# Altium PCB PCB1.PcbDoc
Units mm, origin at the board's own origin, x right, y up, seen from the top; angles counter-clockwise.
Board outline 196.75 x 32.25 mm, 2 copper layers (Top Layer, Bottom Layer); 33 components, 77 nets, 283 pads, 68 vias.
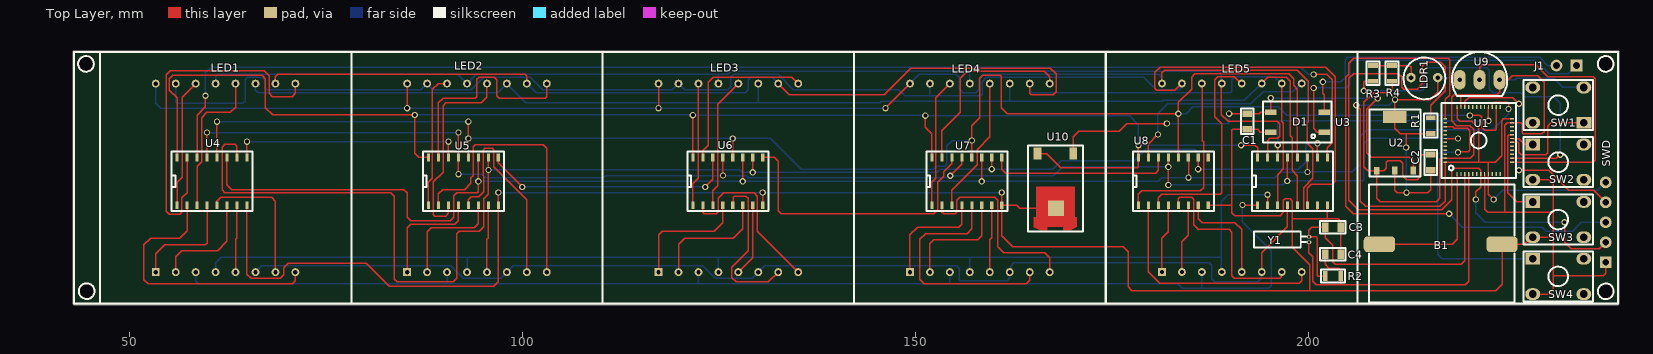
[diagram p0: Top Layer view]
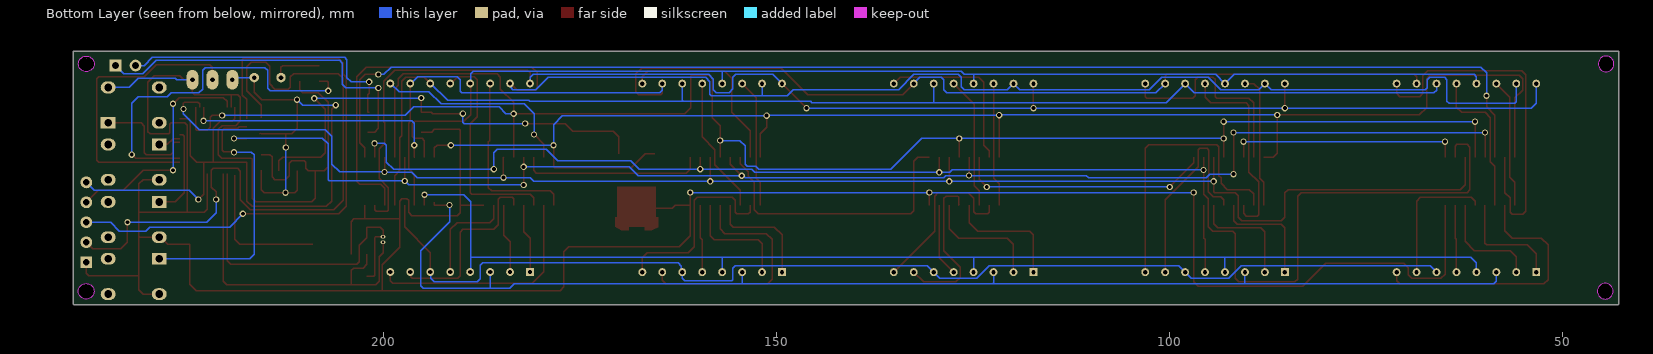
[diagram p1: Bottom Layer view, seen from below]

## Layer stack, top to bottom
Top Solder: solder mask 0.0102, Solder Resist, Dk 3.5
Top Layer: signal copper 0.0356
Dielectric 1: dielectric 0.32, FR-4, Dk 4.8
Bottom Layer: signal copper 0.0356
Bottom Solder: solder mask 0.0102, Solder Resist, Dk 3.5

## Board outline
42.925,62.019 cw(c42.925,62.146) 42.798,62.146 42.798,94.146 cw(c42.925,94.146) 42.925,94.273 239.425,94.273 cw(c239.425,94.146) 239.552,94.146 239.552,62.146 cw(c239.425,62.146) 239.425,62.019
cut-out: 44.425,91.65 cw(c44.425,92.65) 43.425,92.65 cw(c44.425,92.65) 44.425,93.65 cw(c44.425,92.65) 45.425,92.65 cw(c44.425,92.65)
cut-out: 44.525,62.725 cw(c44.525,63.725) 43.525,63.725 cw(c44.525,63.725) 44.525,64.725 cw(c44.525,63.725) 45.525,63.725 cw(c44.525,63.725)
cut-out: 236.9,63.7 ccw(c237.9,63.7) 237.9,62.7 ccw(c237.9,63.7) 238.9,63.7 ccw(c237.9,63.7) 237.9,64.7 ccw(c237.9,63.7)
cut-out: 236.875,92.65 ccw(c237.875,92.65) 237.875,91.65 ccw(c237.875,92.65) 238.875,92.65 ccw(c237.875,92.65) 237.875,93.65 ccw(c237.875,92.65)
cut-out: 238.45,93.326 238.453,93.323
cut-out: 237.875,93.3

## Design rules (kind name [scope] priority, off if disabled: settings)
Clearance [All] p1: gap=0.2 ignorepadtopadclearanceinfootprint=FALSE
PolygonConnect [All] p1: connectstyle=Relief reliefconductorwidth=0.254 reliefentries=4 polygonreliefangle="90 Angle" airgapwidth=0.254
RoutingVias [All] p1: holewidth=0.5 width=0.8 viastyle="Through Hole" minholewidth=0.5 minwidth=0.8 maxholewidth=0.5 maxwidth=0.8
SolderMaskExpansion [All] p1: expansion=0.102
Width [All] p1: maxlimit=0.18 minlimit=0.18 preferedwidth=0.18
30 further rules are at their usual default settings.

## Components (designator, comment, footprint, x,y, rotation, side; value= is the part's Value field where it differs from the comment)
B1 "cr1202" CR1220 216.882,69.699 r270 top
C1 "102pF" C0805 192.244,85.32 r90 top
C2 "102pF" C0805 215.612,80.113 r270 top
C3 "102pF" C0805 203.166,71.846 r180 top
C4 "102pF" C0805 203.166,68.429 r180 top
D1 "MB2S" TO-269AA 198.645,85.247 r180 top
J1 "Power" "Header 2x1 TH Pitch 2.54mm" 232.884,92.446 r180 top
LDR1 "LDR" LDR_CELL_THRU_HOLE 214.801,90.908 r0 top
LED1 "1088AS/BS" LED_MATRIX_1088AS/BS 62.196,78.146 r0 top
LED2 "1088AS/BS" LED_MATRIX_1088AS/BS 94.2,78.146 r0 top
LED3 "1088AS/BS" LED_MATRIX_1088AS/BS 126.204,78.146 r0 top
LED4 "1088AS/BS" LED_MATRIX_1088AS/BS 158.208,78.146 r0 top
LED5 "1088AS/BS" LED_MATRIX_1088AS/BS 190.288,78.157 r0 top
R1 "10k" R0805 217.136,84.746 r270 top
R2 "1M" R0805 203.116,64.122 r180 top
R3 "10k" R0805 209.77,91.396 r270 top
R4 "10k" R0805 212.214,91.396 r270 top
SW1 "Button1" BUTTON_HOLE_5.0mm 231.843,87.406 r270 top
SW2 "Button1" BUTTON_HOLE_5.0mm 231.843,80.149 r90 top
SW3 "Button1" BUTTON_HOLE_5.0mm 231.843,72.838 r90 top
SW4 "Button1" BUTTON_HOLE_5.0mm 231.843,65.599 r90 top
SWD "SWD" "Header 5x1 TH Pitch 2.54mm" 237.875,72.493 r90 top (schematic designator J2)
U1 "STM32F100C8T6" LQFP048_FPT-48P-M05 221.708,82.907 r90 top
U2 "AMS1117" SOT223-3 211.04,82.526 r0 top
U3 "74HC595D" SO16 197.705,77.8 r90 top
U4 "74HC595D" SO16 60.164,77.8 r90 top
U5 "74HC595D" SO16 92.168,77.8 r90 top
U6 "74HC595D" SO16 125.823,77.8 r90 top
U7 "74HC595D" SO16 156.252,77.8 r90 top
U8 "74HC595D" SO16 182.544,77.8 r90 top
U9 "LM35" TO92A 221.828,90.646 r0 top
U10 "LM7805" TO252-3 167.811,76.68 r180 top
Y1 "32.768KHz" DT-26 200.113,70.303 r0 top

## Footprints (in the part's own frame and the unit in brackets; to place one, negate y for a bottom-side part, rotate by r counter-clockwise, add the part's x,y. Pads: shape width x height; smd on the part's side, far side on the other; paste and mask are expansions set on the pad)
BUTTON_HOLE_5.0mm [mm]
  rect 1.5x1.9 hole 1: 1(2.25,3.25)
  oval 1.5x1.9 hole 1: 2(2.25,-3.25) 3(-2.25,3.25) 4(-2.25,-3.25)
  silkscreen extent -3.18,-4.4 3.17,4.42, body extent -3,-3.86 3,3.86, height 5
C0805 [mm]
  rect 0.8x1.2 smd: 1(-1,0) 2(1,0)
  silkscreen extent -1.6,-0.81 1.63,0.81, body extent -1,-0.62 1,0.63, height 0.58
CR1220 [mm]
  rrect50% 2x4 smd: 1(0,-7.8) 2(0,7.8)
  silkscreen extent -7.62,-9.15 7.4,9.37, body extent -7.62,-9.1 7.37,9.4, height 4.04
DT-26 [mm]
  oval 0.6x0.5 hole 0.3: 1(0,0.35) 2(0,-0.35)
  silkscreen extent -7,-1 -0.35,1, body extent -7,-1 0.14,1, height 2
"Header 2x1 TH Pitch 2.54mm" [mm]
  rect 1.5x1.5 hole 0.85: 1(-1.27,0)
  round 1.5 hole 0.85: 2(1.27,0)
  body extent -2.54,-1.27 2.54,1.27, height 8.89
"Header 5x1 TH Pitch 2.54mm" [mm]
  rect 1.5x1.5 hole 0.85: 1(-5.08,0)
  round 1.5 hole 0.85: 2(-2.54,0) 3(0,0) 4(2.54,0) 5(5.08,0)
  body extent -6.35,-1.27 6.35,1.27, height 8.89
LDR_CELL_THRU_HOLE [mm]
  round 1.2 hole 0.6: 1(-1.7,0) 2(1.7,0)
  silkscreen extent -2.65,-2.76 2.66,2.56, body extent -2.55,-2.15 2.55,2.15, height 2.02
LED_MATRIX_1088AS/BS [mm]
  rect 1x1 hole 0.55: 1(-8.89,-12)
  round 1 hole 0.55: 2(-6.35,-12) 3(-3.81,-12) 4(-1.27,-12) 5(1.27,-12) 6(3.81,-12) 7(6.35,-12) 8(8.89,-12) 9(8.89,12) 10(6.35,12) 11(3.81,12) 12(1.27,12) 13(-1.27,12) 14(-3.81,12) 15(-6.35,12) 16(-8.89,12)
  silkscreen extent -16,-16 16,16, body extent -16,-16 16,16, height 8
LQFP048_FPT-48P-M05 [mm]
  rect 0.5x0.18 smd: 1(-4.25,2.75) 2(-4.25,2.25) 3(-4.25,1.75) 4(-4.25,1.25) 5(-4.25,0.75) 6(-4.25,0.25) 7(-4.25,-0.25) 8(-4.25,-0.75) 9(-4.25,-1.25) 10(-4.25,-1.75) 11(-4.25,-2.25) 12(-4.25,-2.75) 25(4.25,-2.75) 26(4.25,-2.25) 27(4.25,-1.75) 28(4.25,-1.25) 29(4.25,-0.75) 30(4.25,-0.25) 31(4.25,0.25) 32(4.25,0.75) 33(4.25,1.25) 34(4.25,1.75) 35(4.25,2.25) 36(4.25,2.75)
  rect 0.18x0.5 smd: 13(-2.75,-4.25) 14(-2.25,-4.25) 15(-1.75,-4.25) 16(-1.25,-4.25) 17(-0.75,-4.25) 18(-0.25,-4.25) 19(0.25,-4.25) 20(0.75,-4.25) 21(1.25,-4.25) 22(1.75,-4.25) 23(2.25,-4.25) 24(2.75,-4.25) 37(2.75,4.25) 38(2.25,4.25) 39(1.75,4.25) 40(1.25,4.25) 41(0.75,4.25) 42(0.25,4.25) 43(-0.25,4.25) 44(-0.75,4.25) 45(-1.25,4.25) 46(-1.75,4.25) 47(-2.25,4.25) 48(-2.75,4.25)
  silkscreen extent -4.75,-4.75 4.75,4.75, body extent -4.5,-4.5 4.5,4.5, height 1.5
R0805 [mm]
  rect 0.6x1.24 smd: 1(-1.05,-1.524) 2(0.95,-1.524)
  silkscreen extent -1.57,-2.36 1.45,-0.69, body extent -1.05,-2.15 0.95,-0.9, height 0.45
SO16 [mm]
  rect 1x0.4 smd: 1(-3.137,4.14) 2(-3.137,2.87) 3(-3.137,1.6) 4(-3.137,0.33) 5(-3.137,-0.94) 6(-3.137,-2.21) 7(-3.137,-3.48) 8(-3.137,-4.75) 9(2.948,-4.748) 10(2.948,-3.478) 11(2.948,-2.208) 12(2.948,-0.938) 13(2.948,0.332) 14(2.948,1.602) 15(2.948,2.872) 16(2.948,4.142)
  silkscreen extent -3.86,-5.46 3.68,4.85, body extent -3.17,-5.29 2.97,4.68, height 1.75
SOT223-3 [mm]
  rect 0.7x1 smd: 1(-2.3,-3.475) 2(0,-3.45) 3(2.325,-3.45)
  rect 3x1.5 smd: 2(0,3.375)
  silkscreen extent -3.25,-4.2 3.25,4.35, body extent -3.25,-3.5 3.25,3.5, height 1.7
TO92A [mm]
  oval 1.5x2.5 hole 0.6: 1(-2.54,0) 2(0,0) 3(2.54,0)
  silkscreen extent -3.51,-2.05 3.51,3.52, body extent -2.74,-1.38 2.78,2.3, height 9.79
TO252-3 [mm]
  rect 1x1.5 smd: 1(-2.284,-4.568) 3(2.262,-4.568)
  rect 2x2 smd: 2(-0.1,2.4)
  Top Layer region: -1.954,5.186 -2.767,4.779 -2.767,3.535 -2.513,3.535 -2.513,-0.351 2.44,-0.351 2.44,3.535 2.745,3.535 2.745,4.814 1.932,5.186 0.992,5.186 0.992,4.779 -0.989,4.779 -0.989,5.186
  silkscreen extent -3.53,-5.56 3.48,5.33, body extent -3.39,-4.93 3.34,5.17, height 2.37
TO-269AA [mm]
  rect 1.5x0.7 smd: 1(-3.4,1.275) 2(-3.4,-1.275) 3(3.4,-1.25) 4(3.4,1.275)
  silkscreen extent -4.34,-2.62 4.37,2.62, body extent -3.52,-2.47 3.52,2.47, height 2.7

## Part data
B1: library part Batery
C1 C2 C3 C4: library part Capacitors(SMD)
D1: library part "Diode MB2S"
J1: library part "Header 2x1 TH Pitch 2.54mm"
LED1 LED2 LED3 LED4 LED5: library part LED_MATRIX_1088AS/BS
R1 R2 R3 R4: library part "Resistor SMD"
SWD: library part "Header 5x1 TH Pitch 2.54mm"
U2: library part AMS1117(SOT-223)
Y1: library part "Crystal 32.768KHz"

## Via types
v1: diameter 0.8, hole 0.5, Top Layer to Bottom Layer, 68 vias

## Nets (pads, with @x,y where several pads share a name; then routed paths per layer and width w, separated by ;. In a path a pad name is that pad's centre, name@x,y a point inside that pad or via, vN(x,y) a via of type N, cw(c..) or ccw(c..) an arc to the next point about the centre after c; other vN are vias at no path point)
3.3V: C2.2 LDR1.2 R1.2 SWD.5 U1.9 U1.24 U1.36 U1.48 U2.2 U9.1 | length 113.2
  Top Layer w0.18: v1(206.127,87.407) 206.65,86.884 206.65,75.185 207.33,74.505 216.778,74.505 217.458,75.185 U1.48 221.745,80.157 ; U2.2@211.04,79.076 211.04,76.591 211.375,76.256 v1(212.53,76.256) 215.206,76.256 215.612,76.662 C2.2 ; v1(212.475,82.025) 212.461,82.039 212.461,83.747 ; R1.2 215.612,83.747 212.461,83.747 ; R1.2@215.723,83.747 R1.2@215.772,83.796 ; LDR1.2 216.501,89.071 215.53,88.1 v1(211.05,88.1) 211.04,88.09 211.04,85.901 211.04,84.458 211.751,83.747 212.461,83.747 ; U1.36 218.958,85.675 219.288,85.345 220.805,85.345 221.708,84.442 221.708,80.194 221.745,80.157 ; v1(223.618,75.4) 222.958,76.06 U1.9 222.958,80.157 ; U1.24 224.87,85.657 224.631,85.418 224.631,80.963 223.825,80.157 222.958,80.157 ; 221.745,80.157 222.958,80.157
  Bottom Layer w0.18: v1(206.127,87.407) 210.357,87.407 v1(211.05,88.1) ; v1(212.475,82.025) 212.503,81.997 212.503,76.284 v1(212.53,76.256) ; LDR1.2 219.026,90.908 U9.1 ; v1(223.618,75.4) 224.768,76.55 236.852,76.55 SWD.5
GND: B1.2 C1.1 C2.1 C3.1 C4.1 D1.4 R4.2 SW1.3 SW2.3 SW3.3 SW4.3 SWD.1 U1.8 U1.23 U1.35 U1.47 U2.1 U3.8 U4.8 U5.8 U6.8 U7.8 U8.8 U9.3 U10.2 | length 418.8
  Top Layer w0.18: U4.8 64.914,65.889 65.447,65.356 69.156,65.356 69.629,65.829 69.629,66.729 70.175,67.275 80.101,67.275 83.011,64.365 96.357,64.365 96.918,64.926 U5.8 v1(96.918,76.278) ; U6.8 v1(130.573,76.278) ; v1(161.002,76.278) U7.8 ; U10.2@167.527,74.663 U10.2 163.277,74.28 162.893,74.663 U7.8 ; U8.8 190.241,74.663 190.252,74.652 190.288,74.688 ; D1.4 193.913,83.972 193.565,84.32 C1.1 190.415,84.32 190.288,84.193 190.288,74.688 ; U3.8 202.455,72.932 ; C4.1 C3.1 204.166,72.584 203.818,72.932 202.455,72.932 ; R4.2 210.69,89.365 210.325,89 208.34,89 207.082,87.742 207.082,79.576 207.607,79.051 U2.1 ; C2.1 214.534,81.113 214.24,80.819 214.24,78.277 213.862,77.899 212.54,77.899 212.047,78.392 212.047,80.021 211.751,80.316 210.127,80.316 209.96,80.149 209.96,79.385 209.626,79.051 U2.1 ; U1.35 219.458,88.726 ; U1.8 222.458,74.162 222.845,73.775 225.036,73.775 ; SW4.3 230.624,63.349 231.175,63.9 231.175,65.677 ; SW2.3 230.651,77.899 231.175,77.375 231.175,73.775 ; SWD.1 237.9,67.388 237.9,66.025 237.552,65.677 236.139,65.677 231.175,65.677 ; U7.8 161.002,70.774 162.42,69.356 176.44,69.356 177.075,68.721 177.075,64.263 177.53,63.808 200.217,63.808 ; 190.288,74.688 190.288,73.702 190.665,73.325 196.425,73.325 196.867,73.767 196.867,75.265 197.066,75.465 197.73,75.465 198.01,75.185 198.01,72.932 ; 198.01,72.932 202.455,72.932 ; 198.01,72.932 198.01,69.293 200.217,67.086 200.217,63.808 ; 200.217,63.808 223.883,63.808 224.682,64.607 B1.2 227.504,69.699 228.393,70.588 SW3.3 231.101,70.588 231.15,70.637 231.175,70.637 ; U2.1 208.74,75.526 209.168,75.098 216.334,75.098 216.775,75.539 216.775,80.567 216.865,80.657 U1.47 220.652,80.657 221.078,81.083 221.078,84.322 220.588,84.812 218.875,84.812 218.279,85.408 218.279,88.419 218.586,88.726 219.458,88.726 ; 219.458,88.726 224.06,88.726 224.368,89.034 U9.3 225.458,90.646 225.958,91.146 229.203,91.146 230.057,90.292 230.057,84.032 229.772,83.747 227.414,83.747 227.241,83.92 227.241,84.954 227.038,85.157 U1.23 225.355,85.157 225.036,84.838 225.036,73.775 ; 225.036,73.775 231.175,73.775 ; 231.175,65.677 231.175,70.637 ; 231.175,70.637 231.175,73.775
  Bottom Layer w0.18: v1(96.918,76.278) v1(130.573,76.278) v1(161.002,76.278) ; U9.3 226.382,90.646 226.542,90.806 231.258,90.806 232.409,89.656 SW1.3
NetB1_1: B1.1 U1.1 | length 18.3
  Top Layer w0.18: B1.1 218.349,69.699 218.958,70.308 U1.1@218.958,78.487
NetC1_2: C1.2 D1.3 U2.3 U10.1 | length 59.7
  Top Layer w0.18: U10.1 170.095,83.395 170.8,84.1 175.929,84.1 176.884,85.055 v1(182.013,85.055) ; v1(189.954,86.32) C1.2 192.253,86.311 193.763,86.311 193.949,86.497 D1.3 v1(195.245,88.3) ; v1(208.866,88.266) 207.462,86.862 207.462,81.351 208.029,80.784 212.893,80.784 213.365,80.311 U2.3
  Bottom Layer w0.18: v1(182.013,85.055) 189.752,85.055 189.954,85.257 v1(189.954,86.32) ; v1(195.245,88.3) 195.278,88.3 195.295,88.283 208.849,88.283 v1(208.866,88.266)
NetC3_2: C3.2 R2.2 U1.3 Y1.1 | length 43
  Top Layer w0.18: R2.2 201.29,65.646 201.185,65.751 201.185,70.537 201.069,70.653 Y1.1 200.113,71.5 200.458,71.846 C3.2 202.166,70.537 203.147,69.556 203.147,67.469 203.474,67.143 219.509,67.143 219.958,67.592 U1.3
NetC4_2: C4.2 R2.1 U1.4 Y1.2 | length 44.4
  Top Layer w0.18: Y1.2 200.113,68.591 200.601,68.103 200.601,65.014 201.046,64.569 204.166,64.569 ; C4.2 202.166,67.143 202.652,66.657 203.866,66.657 204.166,66.357 R2.1 204.166,64.569 ; U1.4 220.458,65.004 220.023,64.569 204.166,64.569
NetD1_1: D1.1 J1.1 | length 44.3
  Top Layer w0.18: v1(200.702,89.587) 200.702,84.455 201.185,83.972 D1.1
  Bottom Layer w0.18: v1(200.702,89.587) 204.841,89.587 205.3,90.047 205.3,92.75 205.645,93.095 228.98,93.095 230.684,91.391 233.099,91.391 J1.1
NetD1_2: D1.2 J1.2 | length 36.9
  Top Layer w0.18: D1.2@201.871,86.522 D1.2 202.045,88.726 201.871,88.9 v1(201.871,90.375)
  Bottom Layer w0.18: v1(201.871,90.375) 204.175,90.375 204.704,90.904 204.704,93.208 204.971,93.475 229.467,93.475 230.496,92.446 J1.2
NetLDR1_1: LDR1.1 R3.1 R4.1 | length 6.3
  Top Layer w0.18: R3.1 R4.1 212.894,92.446 213.101,92.239 LDR1.1
NetLED1_1: LED1.1 U4.4 | length 14.3
  Top Layer w0.18: LED1.1 53.306,68.481 54.44,69.615 59.634,69.615 59.834,69.815 U4.4
NetLED1_2: LED1.2 U4.6 | length 13.9
  Top Layer w0.18: LED1.2 55.846,68.113 56.608,68.875 61.175,68.875 62.374,70.074 U4.6
NetLED1_3: LED1.3 LED2.3 LED3.3 LED4.3 LED5.3 U3.1 | length 159.3
  Top Layer w0.18: v1(191.644,74.688) 193.539,74.688 U3.1 U3.1@193.565,75.033
  Bottom Layer w0.18: LED1.3 58.386,65.014 58.75,64.65 90.376,64.65 ; LED2.3 90.39,64.664 90.376,64.65 ; LED3.3 122.394,64.806 122.55,64.65 ; LED4.3 154.398,64.65 ; LED5.3 186.478,64.085 186.468,64.075 ; v1(191.644,74.688) 191.644,72.531 195.295,68.88 195.295,64.395 194.975,64.075 186.468,64.075 ; 90.376,64.65 122.55,64.65 ; 122.55,64.65 154.398,64.65 ; 154.398,64.65 183.382,64.65 183.957,64.075 186.468,64.075
NetLED1_4: LED1.4 LED2.4 LED3.4 LED4.4 LED5.4 U3.2 | length 151.9
  Top Layer w0.18: U3.2 v1(194.835,75.998)
  Bottom Layer w0.18: LED1.4 60.926,67.316 61.666,68.056 93.005,68.056 ; LED2.4 92.93,67.981 93.005,68.056 ; LED3.4 124.934,67.995 124.995,68.056 ; LED4.4 156.938,68.025 156.969,68.056 ; LED5.4@188.942,66.146 188.942,68.056 ; v1(194.835,75.998) 189.806,75.998 188.942,75.135 188.942,68.056 ; 93.005,68.056 124.995,68.056 ; 124.995,68.056 156.969,68.056 ; 156.969,68.056 188.942,68.056
NetLED1_5: LED1.5 U4.7 | length 8.6
  Top Layer w0.18: LED1.5 63.466,70.309 63.644,70.486 U4.7
NetLED1_6: LED1.6 LED2.6 LED3.6 LED4.6 LED5.6 U3.4 | length 147.4
  Top Layer w0.18: LED5.6@194.022,66.146 LED5.6@194.098,66.222 ; LED5.6 LED5.6@194.098,66.222 ; U3.4 197.375,71.896 194.098,68.619 LED5.6@194.098,66.222
  Bottom Layer w0.18: LED1.6 66.796,66.936 90.893,66.936 92.473,65.356 97.22,65.356 LED2.6 98.8,66.936 122.922,66.936 124.502,65.356 129.224,65.356 LED3.6 130.804,66.936 155.278,66.936 155.568,66.646 155.568,65.156 155.694,65.03 161.692,65.03 162.018,65.356 LED4.6 162.118,66.246 162.118,66.916 162.518,67.316 187.434,67.316 187.75,67 187.75,65.275 188.101,64.924 193.598,64.924 194.022,65.348 LED5.6@194.022,66.146
NetLED1_7: LED1.7 U4.5 | length 17.4
  Top Layer w0.18: U4.5 61.104,75.174 61.58,75.65 68.059,75.65 68.546,75.163 LED1.7
NetLED1_8: LED1.8 U4.2 | length 34.7
  Top Layer w0.18: U4.2 57.294,71.434 56.346,70.486 52.671,70.486 51.8,69.615 51.8,65.17 52.326,64.644 70.669,64.644 71.086,65.061 LED1.8
NetLED1_9: LED1.9 U4.15 | length 47.6
  Top Layer w0.18: U4.15 57.292,76.275 56.608,75.592 56.608,73.755 56.346,73.493 55.033,73.493 54.652,73.874 54.652,91.287 55.133,91.768 67.127,91.768 67.733,91.162 67.733,88.925 68.163,88.495 70.656,88.495 71.086,88.925 LED1.9
NetLED1_10: LED1.10 LED2.10 LED3.10 LED4.10 LED5.10 U3.3 | length 164.1
  Top Layer w0.18: LED1.10 68.546,91.009 68.853,91.316 100.334,91.316 100.55,91.1 LED2.10 ; LED3.10 133.951,88.749 146.067,88.749 149.419,92.101 167.199,92.101 167.911,91.389 167.911,89.079 167.581,88.749 164.736,88.749 164.558,88.927 LED4.10 ; U3.3 196.105,78.567 196.867,79.329 196.867,85.11 196.638,85.339 LED5.10
  Bottom Layer w0.18: LED2.10 101.72,88.976 128.364,88.976 128.744,89.356 128.744,90.646 129.034,90.936 131.764,90.936 LED3.10 ; LED4.10 164.558,89.295 164.877,88.976 190.076,88.976 190.275,89.175 190.275,90.625 190.66,91.01 195.698,91.01 LED5.10@196.562,90.146
NetLED1_11: LED1.11 LED2.11 LED3.11 LED4.11 LED5.11 U3.5 | length 156.6
  Top Layer w0.18: LED5.11@194.022,90.146 194.851,90.975 197.205,90.975 197.73,90.45 197.73,83.49 197.959,83.261 197.959,79.13 198.645,78.445 U3.5
  Bottom Layer w0.18: LED1.11 66.006,89.319 66.349,88.976 96.84,88.976 LED2.11 100.422,87.734 130.014,87.734 ; LED3.11 130.014,87.734 ; LED4.11 162.018,88.003 161.89,87.875 ; LED5.11@194.022,90.146 191.901,88.025 185.625,88.025 185.6,88 181.575,88 181.45,87.875 161.89,87.875 ; 130.014,87.734 145.534,87.734 145.675,87.875 161.89,87.875
NetLED1_12: LED1.12 U4.3 | length 19.3
  Top Layer w0.18: U4.3 58.564,79.64 59.142,80.218 59.142,85.822 59.82,86.5 62.8,86.5 63.466,87.166 LED1.12
NetLED1_13: LED1.13 LED2.13 LED3.13 LED4.13 LED5.13 U3.15 | length 151.7
  Top Layer w0.18: LED5.13@188.942,90.146 188.942,86.209 189.806,85.345 196.09,85.345 196.37,85.065 196.37,83.424 196.141,83.195 195.138,83.195 194.833,82.889 U3.15
  Bottom Layer w0.18: LED1.13 60.926,91.026 61.216,91.316 91.76,91.316 LED2.13 94.1,91.316 124.875,91.316 ; LED3.13 124.934,91.257 124.875,91.316 ; LED4.13 156.938,91.652 156.982,91.696 ; LED5.13@188.942,90.146 188.942,91.393 188.639,91.696 156.982,91.696 ; 124.875,91.316 126.104,91.316 126.484,91.696 156.982,91.696
NetLED1_14: LED1.14 U4.1 | length 16.5
  Top Layer w0.18: U4.1 56.024,77.573 56.659,78.208 56.659,88.419 LED1.14
NetLED1_15: LED1.15 LED2.15 LED3.15 LED4.15 LED5.15 U3.6 | length 193.6
  Top Layer w0.18: LED5.15@183.862,90.146 182.998,89.282 180.763,89.282 180.509,89.536 180.509,91.568 181.18,92.239 202.229,92.239 203.474,90.994 203.474,77.725 203.093,77.344 200.413,77.344 199.915,76.847 U3.6
  Bottom Layer w0.18: LED1.15 55.846,87.854 56.075,87.625 64.412,87.625 64.675,87.888 64.675,90.646 64.965,90.936 66.886,90.936 67.176,90.646 67.176,89.646 67.466,89.356 87.06,89.356 LED2.15 88.64,89.356 93.461,89.356 95.041,90.936 101.007,90.936 102.587,89.356 119.064,89.356 LED3.15 120.644,89.356 126.104,89.356 126.484,89.736 126.484,90.936 126.864,91.316 132.527,91.316 134.487,89.356 147.919,89.356 148.65,88.625 151.814,88.625 ; LED4.15 151.858,88.669 151.814,88.625 ; LED5.15@183.862,90.146 183.862,89.652 183.566,89.356 180.666,89.356 179.086,90.936 159.049,90.936 158.488,90.375 158.488,88.795 158.318,88.625 151.814,88.625
NetLED1_16: LED1.16 LED2.16 LED3.16 LED4.16 LED5.16 U3.7 | length 183.8
  Top Layer w0.18: v1(85.31,87.022) LED2.16 ; v1(117.314,87.022) LED3.16 ; v1(146.194,87.022) LED4.16 ; LED5.16@181.322,90.146 LED5.16@181.322,90.157 ; LED5.16 181.398,91.506 181.751,91.859 198.608,91.859 200.012,90.455 200.012,85.266 199.915,85.169 199.915,82.565 200.607,81.872 200.607,78.077 199.425,76.894 199.425,74.043 199.595,73.873 200.993,73.873 201.185,74.065 U3.7
  Bottom Layer w0.18: LED1.16 53.306,87.657 53.941,87.022 v1(85.31,87.022) v1(117.314,87.022) v1(146.194,87.022) ; LED4.16 150.488,91.316 155.188,91.316 155.568,90.936 155.568,89.482 156.045,89.005 157.699,89.005 158.05,89.356 158.05,90.697 158.669,91.316 181.016,91.316 181.398,90.933 LED5.16
NetLED2_1: LED2.1 U5.4 | length 14.5
  Top Layer w0.18: LED2.1 85.31,71.785 85.75,72.225 91.387,72.225 91.838,72.676 U5.4
NetLED2_2: LED2.2 U5.6 | length 14.4
  Top Layer w0.18: LED2.2 87.85,71.285 88.35,71.785 93.836,71.785 94.378,72.327 U5.6
NetLED2_5: LED2.5 U5.7 | length 8.6
  Top Layer w0.18: LED2.5 95.47,70.309 95.648,70.486 U5.7
NetLED2_7: LED2.7 U5.5 | length 27.3
  Top Layer w0.18: U5.5 93.108,75.363 93.457,75.712 94.41,75.712 95.089,76.391 95.089,78.314 94.982,78.421 94.982,81.657 95.217,81.892 96.158,81.892 96.334,81.716 96.334,79.554 100.55,75.338 LED2.7
NetLED2_8: LED2.8 U5.2 | length 36.3
  Top Layer w0.18: U5.2 89.298,76.126 89.827,76.655 92.613,76.655 93.43,77.472 93.43,78.146 93.717,78.433 93.717,82.096 93.997,82.375 102.607,82.375 103.09,81.892 LED2.8
NetLED2_9: LED2.9 U5.15 | length 27.4
  Top Layer w0.18: U5.15 89.296,87.697 89.89,88.292 93.997,88.292 94.2,88.495 94.2,90.67 94.466,90.936 96.409,90.936 96.718,90.627 96.718,88.607 97.033,88.292 102.887,88.292 103.09,88.495 LED2.9
NetLED2_12: LED2.12 U5.3 | length 25.3
  Top Layer w0.18: U5.3 90.568,73.614 90.238,73.283 88.807,73.283 88.663,73.427 88.663,77.671 89.876,78.883 89.876,87.335 90.238,87.697 94.758,87.697 95.47,88.409 LED2.12
NetLED2_14: LED2.14 U5.1 | length 17.1
  Top Layer w0.18: U5.1 88.028,77.573 88.536,78.081 88.536,89.436 89.246,90.146 LED2.14
NetLED3_1: LED3.1 U6.4 | length 15.8
  Top Layer w0.18: LED3.1 117.314,70.878 117.814,71.378 124.434,71.378 125.493,72.437 U6.4
NetLED3_2: LED3.2 U6.6 | length 15.5
  Top Layer w0.18: LED3.2 119.854,69.679 120.625,70.45 126.826,70.45 128.033,71.657 U6.6
NetLED3_5: LED3.5 U6.7 | length 9.3
  Top Layer w0.18: LED3.5 129.303,67.975 U6.7
NetLED3_7: LED3.7 U6.5 | length 20.7
  Top Layer w0.18: U6.5 126.82,74.72 126.82,75.722 126.931,75.833 128.435,75.833 128.725,75.544 128.725,68.842 126.661,66.778 126.661,65.457 127.22,64.898 131.306,64.898 LED3.7
NetLED3_8: LED3.8 U6.2 | length 22
  Top Layer w0.18: U6.2 122.953,73.763 123.156,73.56 124.629,73.56 124.934,73.865 124.934,75.534 125.625,76.225 129.47,76.225 129.862,75.833 129.862,71.378 LED3.8
NetLED3_9: LED3.9 U6.15 | length 21.9
  Top Layer w0.18: U6.15 122.951,81.586 123.639,82.274 123.639,90.349 124.248,90.959 134.281,90.959 LED3.9
NetLED3_12: LED3.12 U6.3 | length 16.8
  Top Layer w0.18: U6.3 124.223,76.532 124.822,77.131 124.822,87.494 LED3.12
NetLED3_14: LED3.14 U6.1 | length 15.8
  Top Layer w0.18: U6.1 121.683,77.395 122.394,78.106 LED3.14
NetLED4_1: LED4.1 U7.4 | length 14.3
  Top Layer w0.18: LED4.1 149.318,70.893 150.277,71.852 155.502,71.852 155.922,72.272 U7.4
NetLED4_2: LED4.2 U7.6 | length 14.5
  Top Layer w0.18: LED4.2 151.858,69.758 152.358,70.258 157.954,70.258 158.462,70.766 U7.6
NetLED4_5: LED4.5 U7.7 | length 8.6
  Top Layer w0.18: LED4.5 159.478,70.258 159.732,70.512 U7.7
NetLED4_7: LED4.7 U7.5 | length 30.7
  Top Layer w0.18: U7.5 157.192,71.642 156.609,71.059 151.296,71.059 150.575,70.338 150.575,65.225 151.13,64.67 164.095,64.67 164.558,65.133 LED4.7
NetLED4_8: LED4.8 U7.2 | length 25
  Top Layer w0.18: U7.2 153.382,73.781 153.603,73.56 155.066,73.56 155.287,73.781 155.287,75.312 155.643,75.668 160.138,75.668 160.494,75.312 160.494,69.356 161.25,68.6 166.506,68.6 167.098,68.008 LED4.8
NetLED4_9: LED4.9 U7.15 | length 24
  Top Layer w0.18: U7.15 153.38,84.175 155.722,86.517 155.722,90.81 156.633,91.721 166.412,91.721 167.098,91.035 LED4.9
NetLED4_12: LED4.12 U7.3 | length 17.5
  Top Layer w0.18: U7.3 154.652,76.557 157.88,79.785 157.88,81.753 159.478,83.351 LED4.12
NetLED4_14: LED4.14 U7.1 | length 16.4
  Top Layer w0.18: U7.1 152.112,77.573 152.62,78.081 152.62,88.368 LED4.14
NetLED5_1: LED5.1 U8.4 | length 9
  Top Layer w0.18: LED5.1@181.322,66.146 LED5.1@181.398,66.222 ; LED5.1 LED5.1@181.398,66.222 ; U8.4 182.213,71.286 181.398,70.471 LED5.1@181.398,66.222
NetLED5_2: LED5.2 U8.6 | length 9
  Top Layer w0.18: LED5.2@183.862,66.146 LED5.2@183.938,66.222 ; LED5.2 LED5.2@183.938,66.222 ; U8.6 184.753,70.85 183.938,70.035 LED5.2@183.938,66.222
NetLED5_5: LED5.5 U8.7 | length 13.2
  Top Layer w0.18: U8.7 186.023,72.963 186.54,72.446 190.692,72.446 191.558,71.58 LED5.5
NetLED5_7: LED5.7 U8.5 | length 24
  Top Layer w0.18: U8.5 183.483,75.47 183.681,75.668 185.171,75.668 185.425,75.414 185.425,72.178 186.023,71.58 189.954,71.58 190.288,71.246 190.288,65.701 190.622,65.367 196.37,65.367 196.562,65.559 LED5.7@196.562,66.146
NetLED5_8: LED5.8 U8.2 | length 29.8
  Top Layer w0.18: U8.2 179.673,66.217 181.14,64.75 198.875,64.75 199.178,65.054 LED5.8
NetLED5_9: LED5.9 U8.15 | length 25.9
  Top Layer w0.18: U8.15 179.671,82.45 v1(180.89,83.669)
  Bottom Layer w0.18: v1(180.89,83.669) 180.89,86.285 182.16,87.555 192.727,87.555 194.276,89.105 198.061,89.105 LED5.9@199.102,90.146
NetLED5_12: LED5.12 U8.3 | length 27.9
  Top Layer w0.18: U8.3 180.943,75.619 181.372,76.048 188.789,76.048 189.018,76.278 189.018,85.055 188.129,85.944 188.129,90.654 188.491,91.016 190.612,91.016 LED5.12@191.482,90.146
NetLED5_14: LED5.14 U8.1 | length 23.4
  Top Layer w0.18: U8.1 178.403,76.087 178.792,76.475 186.294,76.475 186.713,76.894 186.713,82.715 186.529,82.899 LED5.14@186.529,90.146
NetR3_2: R3.2 U1.14 | length 46
  Top Layer w0.18: v1(207.082,89.228) 207.082,90.308 207.22,90.446 R3.2 ; U1.14 231.596,80.657 232.042,81.104 v1(232.097,81.104)
  Bottom Layer w0.18: v1(207.082,89.228) 214.457,89.228 214.8,89.571 214.8,91.819 215.168,92.186 222.714,92.186 223.075,91.825 223.075,89.45 223.537,88.988 227.082,88.988 227.596,88.475 231.253,88.475 232.097,87.632 v1(232.097,81.104)
NetSW1_1: SW1.1 U1.18 | length 14.1
  Top Layer w0.18: U1.18 226.712,82.657 226.843,82.526 226.843,81.388 227.128,81.104 230.225,81.104 230.488,81.367 230.488,84.747 230.898,85.156 SW1.1
NetSW2_1: SW2.1 U1.19 | length 2.9
  Top Layer w0.18: U1.19 226.843,83.157 227.601,82.399 SW2.1
NetSW3_1: SW3.1 U1.20 | length 11.5
  Top Layer w0.18: U1.20 225.633,83.657 225.416,83.44 225.416,76.256 226.585,75.088 SW3.1
NetSW4_1: SW4.1 U1.39 | length 35.1
  Top Layer w0.18: U1.39 218.38,84.657 218.606,84.432 220.313,84.432 220.588,84.157 220.588,81.682 220.368,81.461 219.141,81.461 v1(219.08,81.4)
  Bottom Layer w0.18: v1(219.08,81.4) 216.859,81.4 216.526,81.067 216.526,68.424 217.101,67.849 SW4.1
NetU1_13: U1.13 U9.2 | length 38.2
  Top Layer w0.18: U9.2 221.828,92.228 222.166,92.566 228.952,92.566 230.524,90.994 236.277,90.994 236.525,90.746 236.525,80.392 236.29,80.157 U1.13
NetU1_26: U1.26 U3.12 U4.12 U5.12 U6.12 U7.12 U8.12 | length 232.7
  Top Layer w0.18: U4.12 v1(61.102,85.295) ; U5.12 v1(93.106,83.161) v1(93.106,85.295) ; U6.12 v1(126.761,83.161) ; U7.12 v1(157.19,82.903) 157.19,84.756 158.208,85.774 158.208,90.853 158.593,91.238 160.8,91.238 160.926,91.112 160.926,87.092 161.707,86.311 v1(183.481,86.311) ; U8.12 v1(183.481,86.311) ; U3.12 198.643,89.437 198.154,89.926 198.154,90.756 197.514,91.396 185.583,91.396 185.171,90.985 185.171,89.437 183.481,87.747 v1(183.481,86.311) ; v1(220.592,86.096) 221.868,86.096 222.084,85.88 222.084,84.604 222.458,84.229 223.853,84.229 223.958,84.335 U1.26
  Bottom Layer w0.18: v1(61.102,85.295) v1(93.106,85.295) ; v1(93.106,83.161) v1(126.761,83.161) 131.513,83.161 135.451,79.223 152.283,79.223 152.653,79.593 153.75,79.593 154.021,79.864 154.021,82.225 154.698,82.903 v1(157.19,82.903) ; v1(183.481,86.311) 184.461,86.311 185.325,87.175 196.212,87.175 197.292,86.096 v1(220.592,86.096)
NetU1_27: U1.27 U3.11 U4.11 U5.11 U6.11 U7.11 U8.11 | length 198
  Top Layer w0.18: U4.11 62.372,77.25 62.966,76.655 84.903,76.655 85.31,76.248 85.31,73.104 85.74,72.674 90.824,72.674 91.254,73.104 91.254,75.892 91.609,76.248 94.219,76.248 94.376,76.405 v1(94.376,77.7) U5.11 ; v1(128.031,77.7) U6.11 ; v1(158.46,77.7) U7.11 ; U8.11 184.78,80.719 v1(184.78,78.175) ; U3.11 199.915,80.746 199.915,78.902 v1(199.917,78.9) ; U1.27 223.458,87.581 223.665,87.787 225.355,87.787 225.521,87.622 v1(225.521,86.907)
  Bottom Layer w0.18: v1(94.376,77.7) v1(128.031,77.7) v1(158.46,77.7) 180.894,77.7 181.369,78.175 v1(184.78,78.175) 195.748,78.175 196.443,78.869 199.887,78.869 v1(199.917,78.9) 205.625,78.9 206.625,79.9 206.625,83.425 207.48,84.28 223.493,84.28 225.521,86.307 v1(225.521,86.907)
NetU1_28: U1.28 U3.14 | length 33.1
  Top Layer w0.18: U3.14 196.138,80.784 v1(196.138,82.297) ; v1(222.953,85.403) 222.958,85.408 U1.28
  Bottom Layer w0.18: v1(196.138,82.297) 196.138,85.113 196.428,85.403 v1(222.953,85.403)
NetU1_42: U1.42 U3.13 U4.13 U5.13 U6.13 U7.13 U8.13 | length 187.3
  Top Layer w0.18: U4.13 v1(59.832,83.921) ; v1(91.836,78.623) U5.13 v1(91.836,83.923) ; U6.13 125.501,80.737 125.501,78.447 v1(125.512,78.437) ; v1(154.449,78.411) 155.92,79.882 U7.13 ; v1(182.211,77.25) v1(182.211,79.554) U8.13 ; v1(197.344,77.751) 197.358,77.765 197.358,80.734 U3.13 ; U1.42 v1(219.08,83.157)
  Bottom Layer w0.18: v1(59.832,83.921) 91.833,83.921 v1(91.836,83.923) ; v1(91.836,78.623) 94.877,78.623 95.347,78.153 110.303,78.153 110.587,78.437 v1(125.512,78.437) 128.46,78.437 128.744,78.153 154.023,78.153 154.281,78.411 v1(154.449,78.411) 167.636,78.411 168.779,79.554 v1(182.211,79.554) ; v1(182.211,77.25) 196.843,77.25 v1(197.344,77.751) 206.934,77.751 207.101,77.918 207.101,82.474 207.818,83.191 219.046,83.191 v1(219.08,83.157)
NetU3_9: U3.9 U4.14 | length 165.8
  Top Layer w0.18: U4.14 58.562,86.106 59.634,87.178 v1(59.634,88.597) ; v1(200.707,91.316) 202.402,91.316 203.085,90.634 203.085,82.602 202.453,81.97 U3.9
  Bottom Layer w0.18: v1(59.634,88.597) 59.634,91.495 60.388,92.25 199.072,92.25 200.006,91.316 v1(200.707,91.316)
NetU3_10: U3.10 U4.10 U5.10 U6.10 U7.10 U8.10 | length 187.6
  Top Layer w0.18: U4.10 63.642,82.201 63.444,82.399 62.104,82.399 61.775,82.07 61.775,76.604 62.104,76.275 83.224,76.275 83.7,75.8 83.7,65.269 84.045,64.924 91.177,64.924 91.609,65.356 91.609,71.056 91.931,71.378 94.494,71.378 95.064,71.948 95.064,75.478 95.646,76.06 v1@95.646,78.972 ; U5.10 v1@95.646,78.972 ; v1(95.672,79.15) 95.672,78.999 v1@95.646,78.972 ; v1(129.301,78.843) U6.10 ; v1(159.73,79.249) U7.10 ; v1(186.01,79.249) 186.01,80.733 186.023,80.746 U8.10 ; U3.10 v1(201.183,82.544)
  Bottom Layer w0.18: v1(95.672,79.15) 127.65,79.15 127.957,78.843 v1(129.301,78.843) 152.793,78.843 153.163,79.213 v1@160.102,79.213 ; v1(159.73,79.249) 167.514,79.249 168.581,80.316 177.866,80.316 179.35,81.8 185.575,81.8 186.01,81.365 v1(186.01,79.249) 198.768,79.249 199.678,80.16 199.678,82.297 199.925,82.544 v1(201.183,82.544)
NetU4_9: U4.9 U5.14 | length 29.7
  Top Layer w0.18: U4.9 v1(64.912,82.755) ; U5.14 v1(90.566,82.755)
  Bottom Layer w0.18: v1(64.912,82.755) v1(90.566,82.755)
NetU5_9: U5.9 U6.14 | length 32.5
  Top Layer w0.18: U5.9 96.916,80.039 v1(99.966,76.989) ; v1(123.258,76.989) 124.221,77.952 U6.14
  Bottom Layer w0.18: v1(99.966,76.989) v1(123.258,76.989)
NetU6_9: U6.9 U7.14 | length 36.6
  Top Layer w0.18: U6.9 132.054,80.748 132.554,80.248 132.554,73.941 132.935,73.56 152.358,73.56 152.874,74.076 152.874,77.601 153.603,78.33 153.603,78.924 154.65,79.971 U7.14
NetU7_9: U7.9 U8.14 | length 23.4
  Top Layer w0.18: U7.9 161,79.268 161.518,78.75 180.59,78.75 180.941,79.101 U8.14
nRST: R1.1 SWD.2 U1.7 | length 87.4
  Top Layer w0.18: R1.1 215.612,87.382 217.458,89.228 217.458,92.302 216.914,92.845 215.012,92.845 214.525,92.358 214.525,90.1 213.862,89.437 212.16,89.437 211.904,89.694 211.904,90.994 211.502,91.396 205.79,91.396 205.2,90.806 205.2,75.265 206.401,74.065 216.982,74.065 218.254,75.337 218.254,78.983 218.622,79.351 221.708,79.351 221.958,79.101 U1.7 221.958,76.977 221.35,76.369 v1(221.35,75.4) ; v1(232.65,72.493) 232.65,69.953 233.478,69.125 237.047,69.125 SWD.2
  Bottom Layer w0.18: v1(221.35,75.4) 221.35,73.721 222.578,72.493 v1(232.65,72.493)
SWCLK: SWD.3 U1.37 | length 74.1
  Top Layer w0.18: U1.37 217.458,88.135 218.01,88.687 218.01,93.182 217.835,93.357 205.811,93.357 205.2,92.746 205.2,91.343 204.82,90.963 204.82,74.505 205.75,73.575 v1(217.95,73.575)
  Bottom Layer w0.18: v1(217.95,73.575) 219.65,71.875 229.8,71.875 230.315,71.36 233.66,71.36 234.793,72.493 SWD.3
SWDIO: SWD.4 U1.34 | length 29.3
  Top Layer w0.18: U1.34 219.958,87.882 220.422,88.346 226.078,88.346 v1(226.843,87.581) ; v1(226.843,79.113) 230.626,79.113 233.189,76.55 236.358,76.55 SWD.4
  Bottom Layer w0.18: v1(226.843,79.113) v1(226.843,87.581)
VCC: U3.16 U4.16 U5.16 U6.16 U7.16 U8.16 U10.3 | length 192.2
  Top Layer w0.18: U4.16 56.022,88.317 55.033,89.306 55.033,90.756 55.49,91.213 66.844,91.213 67.276,90.781 67.276,87.08 68.202,86.154 86.271,86.154 v1(86.275,86.158) 86.275,81.248 86.775,80.748 U5.16 ; U6.16 121.681,86.131 v1(121.683,86.133) ; v1(151.274,86.067) 151.274,84.609 152.11,83.773 U7.16 ; U10.3 166.699,81.247 168.522,79.425 178.274,79.425 178.401,79.552 U8.16 v1(178.401,82.297) ; v1(191.482,82.297) 193.224,82.297 193.563,81.959 U3.16
  Bottom Layer w0.18: v1(86.275,86.158) 121.657,86.158 v1(121.683,86.133) 121.716,86.1 151.175,86.1 151.208,86.133 v1(151.274,86.067) 177.273,86.067 178.401,84.939 v1(178.401,82.297) v1(191.482,82.297)
pads on no net: SW1.2 SW1.4 SW2.2 SW2.4 SW3.2 SW3.4 SW4.2 SW4.4 U1.2 U1.5 U1.6 U1.10 U1.11 U1.12 U1.15 U1.16 U1.17 U1.21 U1.22 U1.25 U1.29 U1.30 U1.31 U1.32 U1.33 U1.38 U1.40 U1.41 U1.43 U1.44 U1.45 U1.46 U8.9

## Silkscreen, mask and mechanical layers (free items; w line width, h text height)
Top Overlay:
  circle w0.254: c44.525,63.725 r1
  circle w0.254: c44.425,92.65 r1
  circle w0.254: c237.9,63.7 r1
  circle w0.254: c237.875,92.65 r1
  lines w0.254: 42.925,62.146 42.925,94.146 239.425,94.146 239.425,62.146 42.925,62.146